# Altium PCB Board.PcbDoc
Units mil, origin at the board's own origin, x right, y up, seen from the top; angles counter-clockwise.
Board outline 2952.76 x 2952.76 mil, 2 copper layers (Top Layer, Bottom Layer); 48 components, 40 nets, 200 pads, 24 vias.
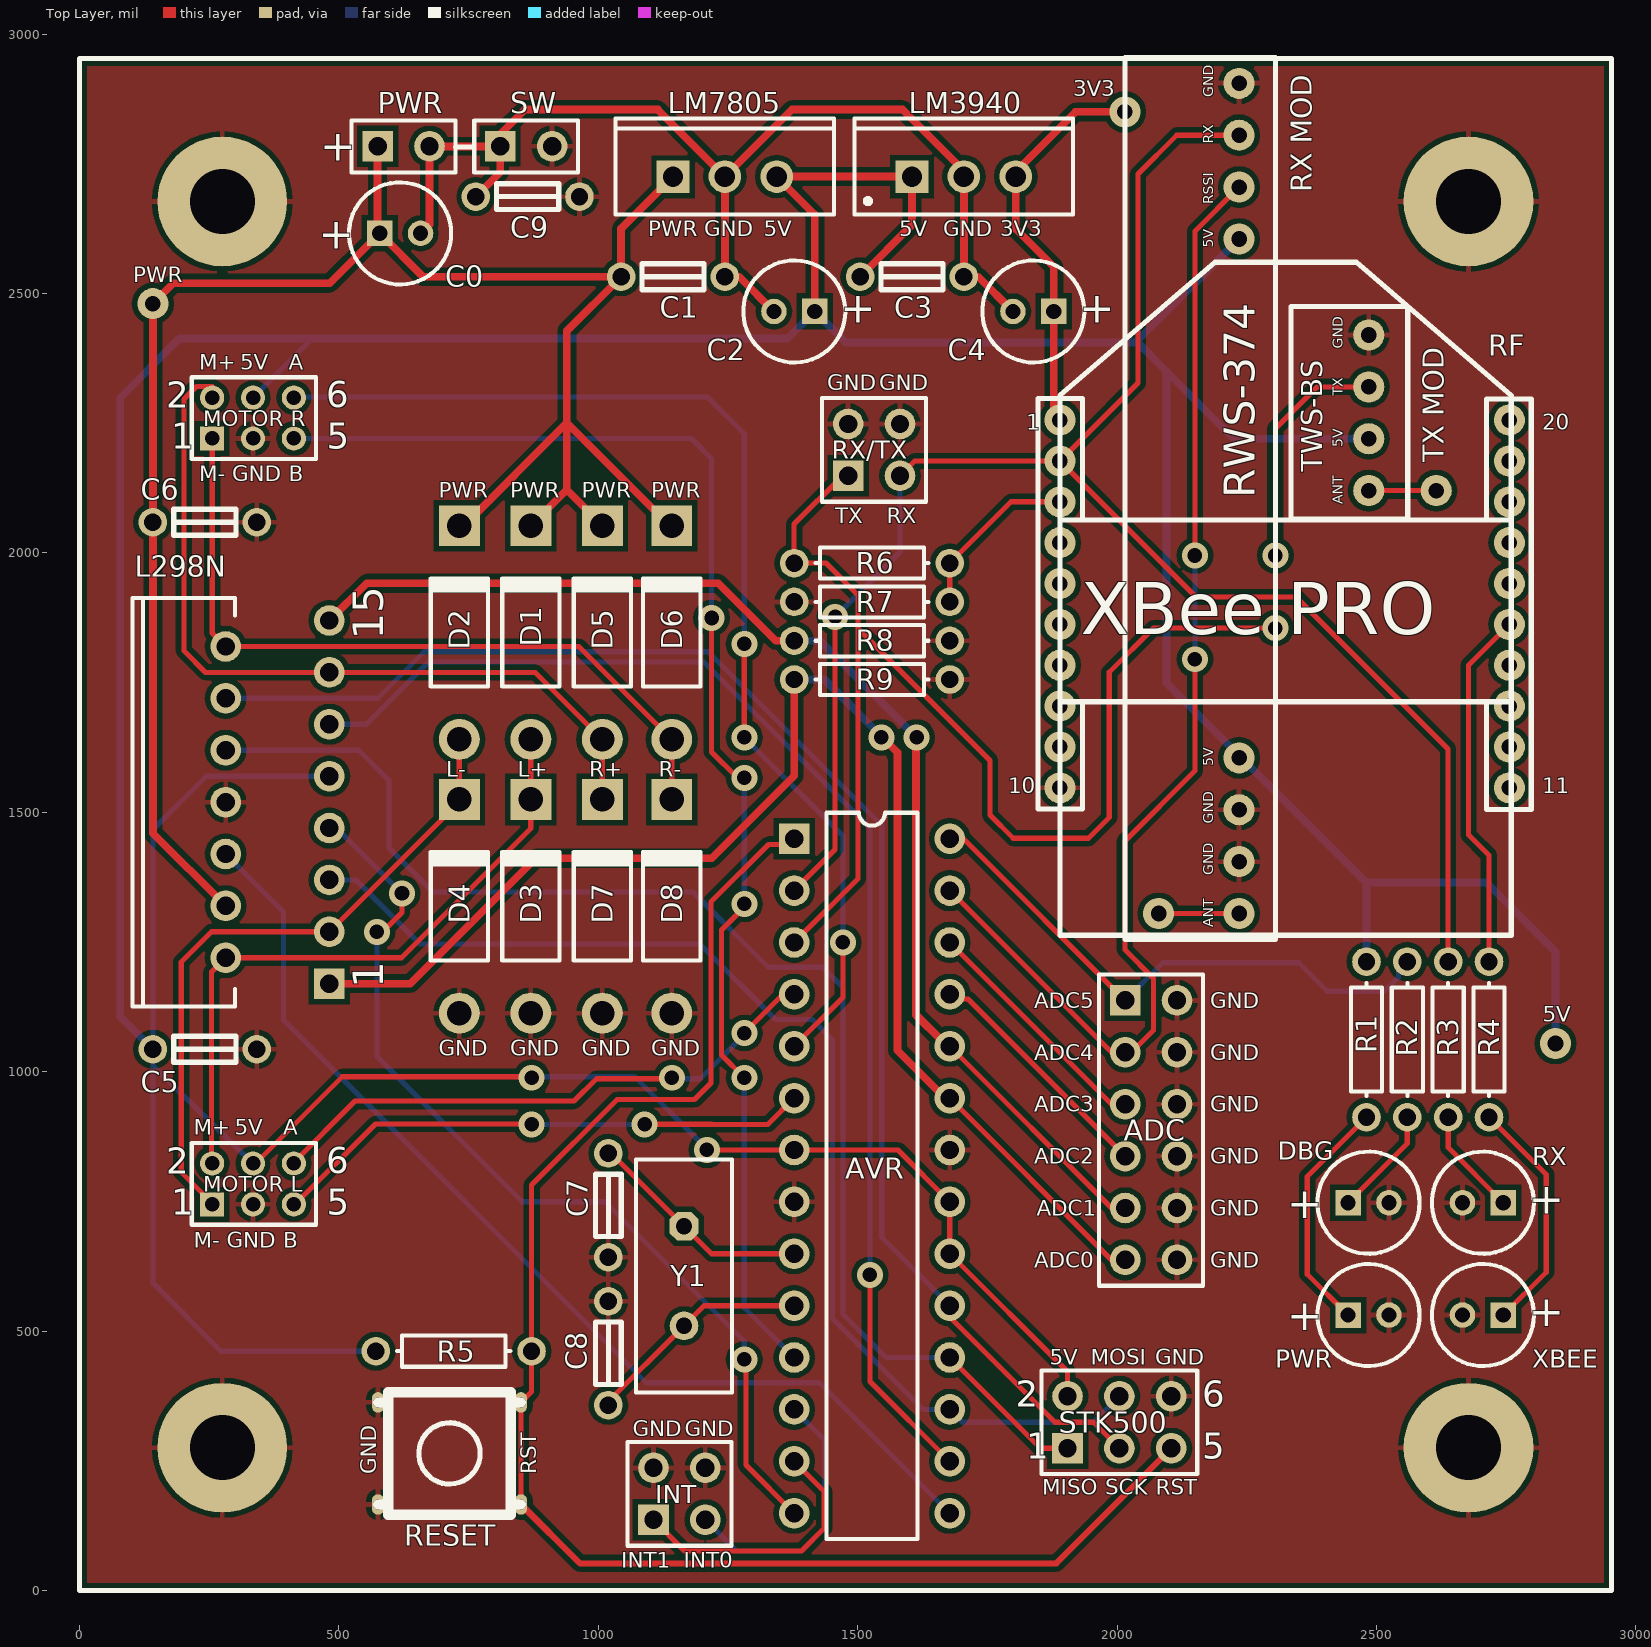
[diagram p0: Top Layer view]
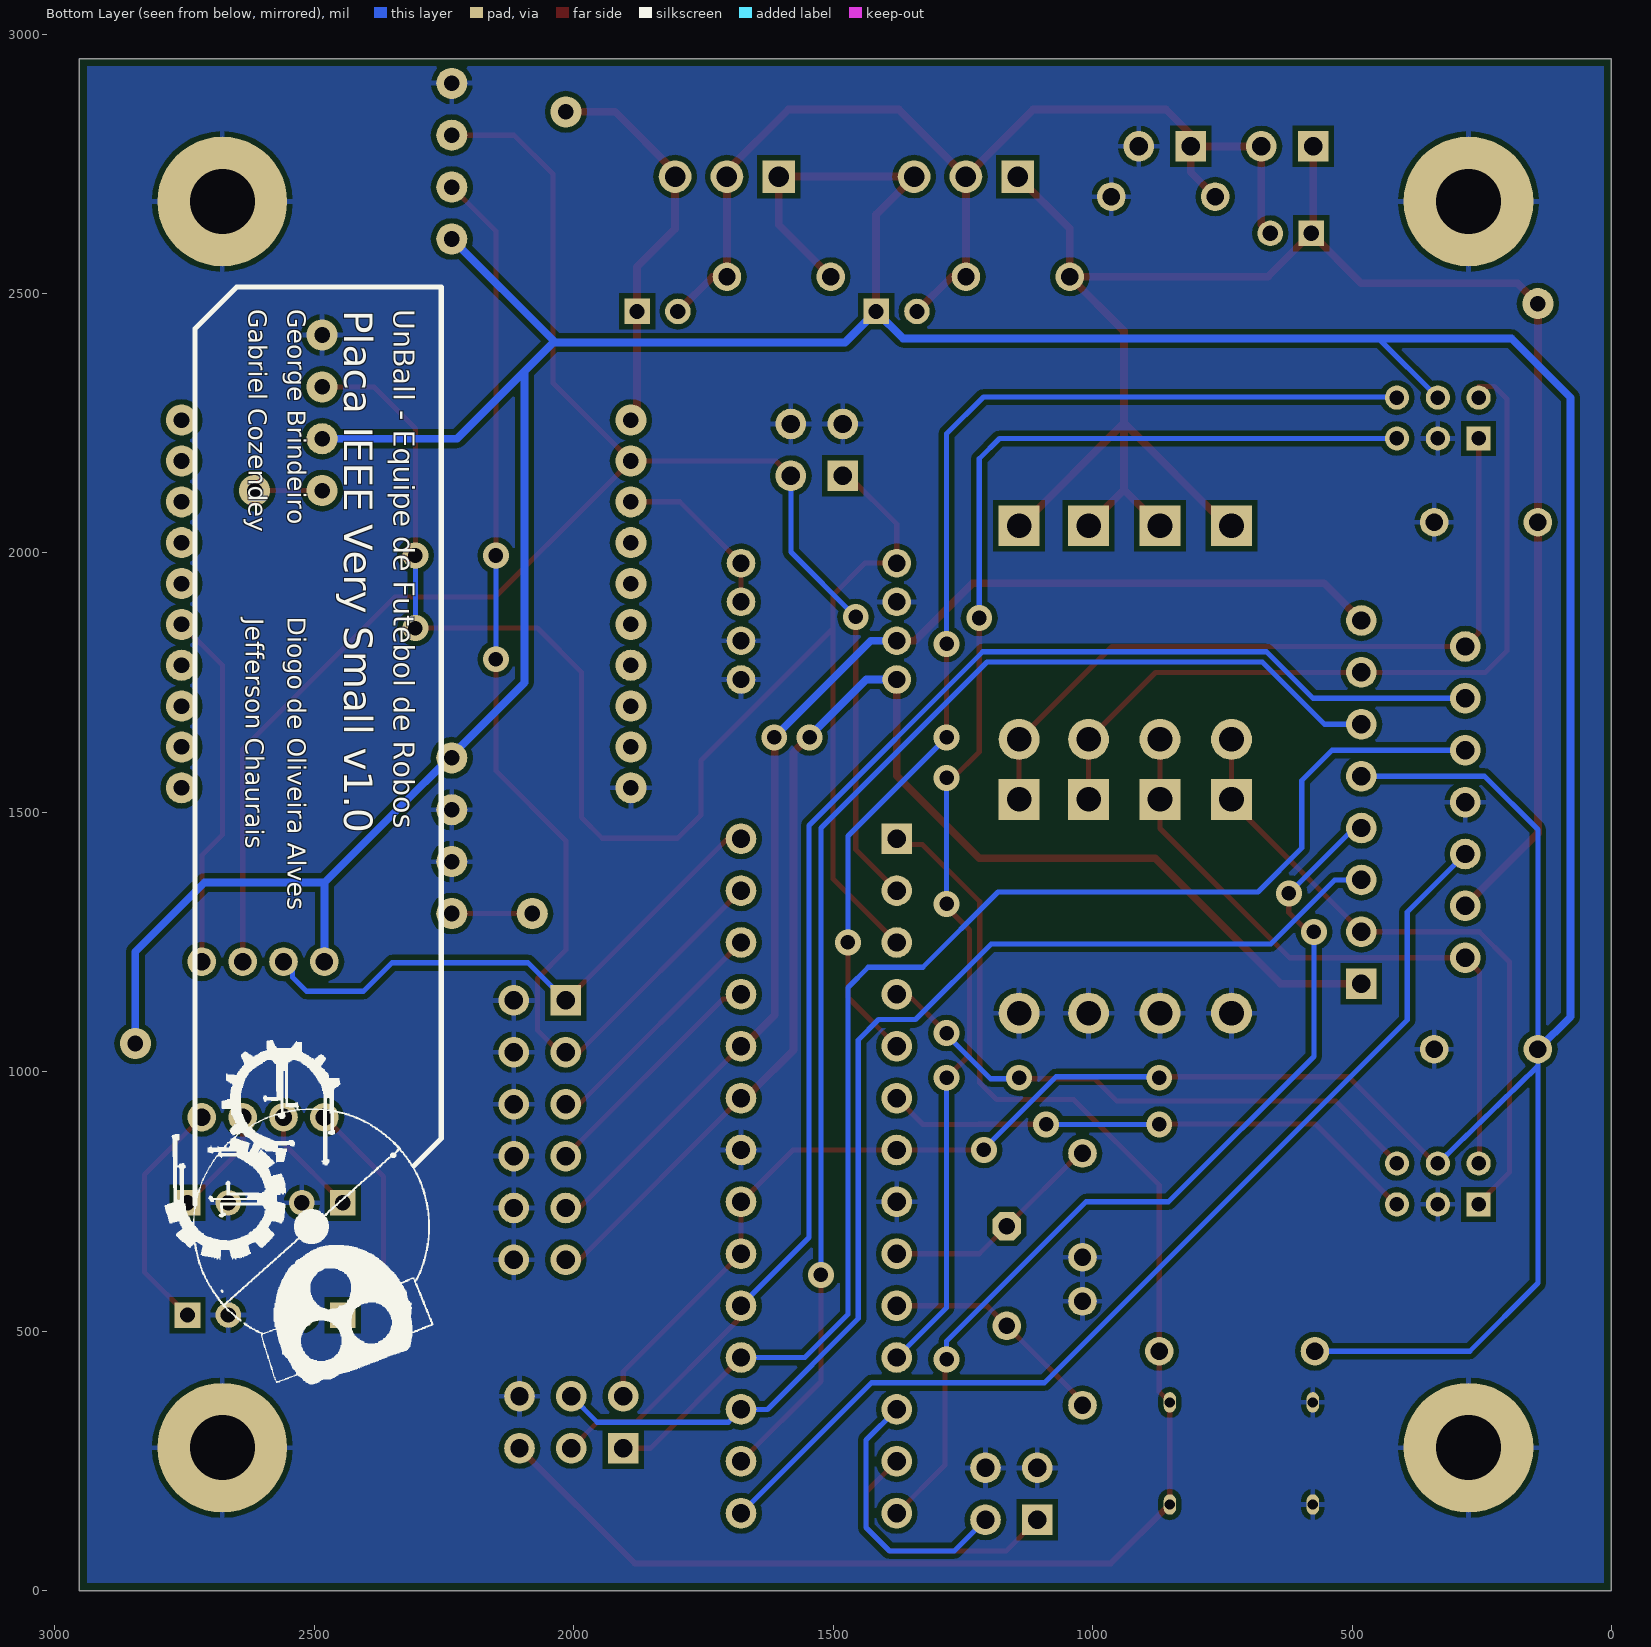
[diagram p1: Bottom Layer view, seen from below]

## Layer stack, top to bottom
Top Layer: signal copper 1.4
Dielectric: dielectric 12.6, FR-4, Dk 4.8
Bottom Layer: signal copper 1.4

## Board outline
0,0 0,2952.76 2952.76,2952.76 2952.76,0

## Design rules (kind name [scope] priority, off if disabled: settings)
Clearance [All] p1: gap=10
HoleSize [All] p1: absolutevalues=TRUE maxlimit=250 minlimit=1 maxpercent=80.000 minpercent=20.000
PolygonConnect [All] p1: connectstyle=Relief reliefconductorwidth=10 reliefentries=4 polygonreliefangle="90 Angle"
RoomDefinition Schematic [InComponentClass('Schematic')] p1: confinementstyle=ConfineIn formatcopy=TRUE lockcomponents=FALSE outline 3100,-140 -115,-140 -115,3085 3100,3085
RoutingVias [All] p1: holewidth=28 width=50 viastyle="Through Hole" minholewidth=28 minwidth=50 maxholewidth=28 maxwidth=50
SilkToSilkClearance [All] p1 off: silktosilkclearance=10
SilkscreenOverComponentPads [All] p1 off: minsilkscreentomaskgap=10
SolderMaskExpansion [All] p1: expansion=4
Width [All] p1: maxlimit=15 minlimit=8 preferedwidth=10
25 further rules are at their usual default settings.

## Components (designator, comment, footprint, x,y, rotation, side; value= is the part's Value field where it differs from the comment)
ADC "Header 6X2" HDR2X6 2015.5,1137.5 r270 top
AVR "ATmega8-16PI" 28P3 1527.56,799.21 r270 top
C0 "Cap Pol1" B 618.11,2615.75 r0 top
C1 "Cap" C_NANO_HOLES 1044.09,2532.28 r0 top
C2 "Cap Pol1" B 1377.95,2465.35 r180 top
C3 "Cap" C_NANO_HOLES 1504.72,2532.28 r0 top
C4 "Cap Pol1" B 1838.58,2465.35 r180 top
C5 "Cap" C_NANO_HOLES 141.73,1043.31 r0 top
C6 "Cap" C_NANO_HOLES 141.73,2059.06 r0 top
C7 "Cap" C_NANO_HOLES 1019.49,842.6 r270 top
C8 "Cap" C_NANO_HOLES 1019.5,357.5 r90 top
C9 "Cap" C_NANO_HOLES 763.78,2686.61 r0 top
D1 "Diode 1N4007" DO-41 870.08,1846.46 r90 top
D2 "Diode 1N4007" DO-41 732.28,1846.46 r90 top
D3 "Diode 1N4007" DO-41 870.08,1318.9 r90 top
D4 "Diode 1N4007" DO-41 732.28,1318.9 r90 top
D5 "Diode 1N4007" DO-41 1007.88,1846.46 r90 top
D6 "Diode 1N4007" DO-41 1141.73,1846.46 r90 top
D7 "Diode 1N4007" DO-41 1007.88,1318.9 r90 top
D8 "Diode 1N4007" DO-41 1141.73,1318.9 r90 top
DBG "LED0" B 2484.51,747.6 r0 top (schematic designator DBG_LED)
INT "Header 2X2" HDR2X2 1106.5,136.5 r0 top
L298N "L298N" Multiwatt15V 381.89,1519.68 r90 top
LM3940 "LM3940IT-3.3" T03B 1704.72,2725.2 r0 top
LM7805 "µA7805CKC" KC03 1244.09,2725.2 r0 top
"MOTOR L" "Header 3X2 (2mm)" HDR2x3_2MM 255.91,744.5 r0 top
"MOTOR R" "Header 3X2 (2mm)" HDR2x3_2MM 255.91,2220.47 r0 top
PWR "LED0" B 2484.51,531.06 r0 top (schematic designator PWR_LED)
PWR "Header 2" HDR1X2 574.8,2783.46 r0 top
R1 "" AXIAL-0.3 2480.57,1062.24 r270 top
R2 "" AXIAL-0.3 2559.32,1062.24 r270 top
R3 "" AXIAL-0.3 2638.06,1062.24 r270 top
R4 "" AXIAL-0.3 2716.8,1062.24 r270 top
R5 "" AXIAL-0.3 721.5,461.5 r180 top
R6 "" AXIAL-0.3 1527.56,1980.31 r180 top
R7 "" AXIAL-0.3 1527.56,1905.51 r180 top
R8 "" AXIAL-0.3 1527.56,1830.71 r180 top
R9 "" AXIAL-0.3 1527.56,1755.91 r180 top
RESET "SW-PB" PUSHBUTTON 831.46,382.52 r180 top
RF "XBee Pro 60mW" XBEE_PRO 1889.76,1547.24 r0 top
RX "LED0" B 2704.98,747.6 r180 top (schematic designator RX_LED)
"RX MOD" "RWS-374" RWS-374 2235,2905 r0 top (schematic designator RX)
RX/TX "Header 2X2" HDR2X2 1481.5,2148.5 r0 top
STK500 "Header 3X2" HDR2X3 1904.5,274.5 r0 top
SW "Header 2" HDR1X2 811.02,2783.46 r0 top (schematic designator PWR_SW)
"TX MOD" "TWS-BS" TWS-BS 2485,2420 r0 top
XBEE "LED0" B 2704.98,531.06 r180 top (schematic designator XBEE_LED)
Y1 "16MHZ" BCY-W2/E4.7 1165.35,606.3 r270 top

## Footprints (in the part's own frame and the unit in brackets; to place one, negate y for a bottom-side part, rotate by r counter-clockwise, add the part's x,y. Pads: shape width x height; smd on the part's side, far side on the other; paste and mask are expansions set on the pad)
28P3 [mm] "DIP; 28 Leads; Row Spacing 7.62 mm; Pitch 2.54 mm"
  rect 1.5x1.5 hole 0.9: 1(-16.51,-3.81)
  round 1.5 hole 0.9: 2(-13.97,-3.81) 3(-11.43,-3.81) 4(-8.89,-3.81) 5(-6.35,-3.81) 6(-3.81,-3.81) 7(-1.27,-3.81) 8(1.27,-3.81) 9(3.81,-3.81) 10(6.35,-3.81) 11(8.89,-3.81) 12(11.43,-3.81) 13(13.97,-3.81) 14(16.51,-3.81) 15(16.51,3.81) 16(13.97,3.81) 17(11.43,3.81) 18(8.89,3.81) 19(6.35,3.81) 20(3.81,3.81) 21(1.27,3.81) 22(-1.27,3.81) 23(-3.81,3.81) 24(-6.35,3.81) 25(-8.89,3.81) 26(-11.43,3.81) 27(-13.97,3.81) 28(-16.51,3.81)
  silkscreen extent -17.78,-2.23 17.78,2.22
AXIAL-0.3 [mm] "Axial Device, Thru-Hole; 2 Leads; 0.3 in Pin Spacing"
  round 1.4 hole 0.85: 1(-3.81,0) 2(3.81,0)
  silkscreen extent -2.77,-0.76 2.77,0.76
B [mm] "Capacitor, Electrolytic, Radial; Body 5 x 6.8 mm (Dia.xH typ); Pin Spacing 2 mm (typ)"
  rect 1.25x1.25 hole 0.75: 1(-1,0)
  round 1.25 hole 0.75: 2(1,0)
  silkscreen extent -2.5,-2.5 2.5,2.5
BCY-W2/E4.7 [mm] "Quartz Crystal, Thru-Hole; 2 Leads; Body 11.35 x 4.65 x 13.46 mm (LxWxH max)"
  oct 1.4x1.4 hole 0.8: 1(-2.44,0)
  round 1.4 hole 0.8: 2(2.44,0)
  silkscreen extent -5.7,-2.35 5.7,2.35
C_NANO_HOLES [mm] "C_NANO com furos maiores"
  round 1.4 hole 0.85: 1(0,0) 2(5.08,0)
  silkscreen extent 1.02,-0.64 4.06,0.63
DO-41 [mm] "Diode, Axial; Body 5.2 x 2.7 mm (LxDia. max), Lead Dia. 0.86 mm (max)"
  round 2 hole 1.2: 1(-5.23,0)
  rect 2x2 hole 1.2: 2(5.23,0)
  silkscreen extent -2.65,-1.4 2.75,1.4
HDR1X2 [mm] "Connector; Header; 2 Position"
  rect 1.5x1.5 hole 0.9: 1(0,0)
  round 1.5 hole 0.9: 2(2.54,0)
  silkscreen extent -1.27,-1.27 3.81,1.27
HDR2X2 [mm] "Connector; Header; 2x2 Position"
  rect 1.5x1.5 hole 0.9: 1(0,0)
  round 1.5 hole 0.9: 2(0,2.54) 3(2.54,0) 4(2.54,2.54)
  silkscreen extent -1.27,-1.27 3.81,3.81
HDR2X3 [mm] "Connector; Header; 3x2 Position"
  rect 1.5x1.5 hole 0.9: 1(0,0)
  round 1.5 hole 0.9: 2(0,2.54) 3(2.54,0) 4(2.54,2.54) 5(5.08,0) 6(5.08,2.54)
  silkscreen extent -1.27,-1.27 6.35,3.81
HDR2x3_2MM [mm] "Header 2x3 (2mm pitch)"
  rect 1.18x1.18 hole 0.71: 1(0,0)
  round 1.18 hole 0.71: 2(0,2) 3(2,0) 4(2,2) 5(4,0) 6(4,2)
  silkscreen extent -1,-1 5.08,3
HDR2X6 [mm] "Connector; Header; 6x2 Position"
  rect 1.5x1.5 hole 0.9: 1(0,0)
  round 1.5 hole 0.9: 2(0,2.54) 3(2.54,0) 4(2.54,2.54) 5(5.08,0) 6(5.08,2.54) 7(7.62,0) 8(7.62,2.54) 9(10.16,0) 10(10.16,2.54) 11(12.7,0) 12(12.7,2.54)
  silkscreen extent -1.27,-1.27 13.97,3.81
KC03 [mm] "TO, Thru-Hole, Vertical, Heatsink Mounted; 3 In-Line Leads; Pitch 2.54 mm"
  rect 1.6x1.6 hole 1: 1(-2.54,0)
  round 1.6 hole 1: 2(0,0) 3(2.54,0)
  silkscreen extent -5.35,-1.85 5.35,2.85
Multiwatt15V [mm] "TO, Thru-Hole, Vertical, Heatsink Mounted; 15 Bent Staggered Leads; Pitch 1.27 mm"
  rect 1.5x1.5 hole 0.9: 1(-8.89,-2.54)
  round 1.5 hole 0.9: 2(-7.62,2.54) 3(-6.35,-2.54) 4(-5.08,2.54) 5(-3.81,-2.54) 6(-2.54,2.54) 7(-1.27,-2.54) 8(0,2.54) 9(1.27,-2.54) 10(2.54,2.54) 11(3.81,-2.54) 12(5.08,2.54) 13(6.35,-2.54) 14(7.62,2.54) 15(8.89,-2.54)
  silkscreen extent -10,2.09 10,7.09
PUSHBUTTON [mm]
  oval 0.6x1 hole 0.5: 1(-0.5,5.5) 1(-0.5,0.5) 2(6.5,5.5) 2(6.5,0.5)
  silkscreen extent -0.5,0 6.5,6
RWS-374 [mil] "Receptor RF (RX)"
  round 60 hole 30: 1(0,0) 2(0,-100) 3(0,-200) 4(0,-300) 5(0,-1300) 6(0,-1400) 7(0,-1500) 8(0,-1600)
  silkscreen extent -220,-1650 70,50
T03B [mm] "TO, Thru-Hole, Vertical, Heatsink Mounted; 3 In-Line Leads; Pitch 2.54 mm"
  rect 1.6x1.6 hole 1: 1(-2.54,0)
  round 1.6 hole 1: 2(0,0) 3(2.54,0)
  silkscreen extent -5.35,-1.85 5.35,2.85, body extent -5.4,-1.9 5.4,2.9, height 19.4
TWS-BS [mil] "Receptor RF (TX)"
  round 60 hole 30: 1(0,0) 2(0,-100) 3(0,-200) 4(0,-300)
  silkscreen extent -150,-355 75,55
XBEE_PRO [mil]
  round 60 hole 30: 1(0,708.66) 2(0,629.92) 3(0,551.18) 4(0,472.44) 5(0,393.7) 6(0,314.96) 7(0,236.22) 8(0,157.48) 9(0,78.74) 10(0,0) 11(866.14,0) 12(866.14,78.74) 13(866.14,157.48) 14(866.14,236.22) 15(866.14,314.96) 16(866.14,393.7) 17(866.14,472.44) 18(866.14,551.18) 19(866.14,629.92) 20(866.14,708.66)
  silkscreen extent 0,-284 870,1013

## Part data
ADC: "Header, 6-Pin, Dual row"
AVR: "8-Bit AVR Microcontroller with 8K Bytes of In-System Programmable Flash Memory"
C0 C2 C4: "Polarized Capacitor (Radial)"
C1 C3 C5 C6 C7 C8 C9: "Capacitor"
D1 D2 D3 D4 D5 D6 D7 D8: "1 Amp General Purpose Rectifier"
DBG PWR RX XBEE: "Typical INFRARED GaAs LED"
INT RX/TX: "Header, 2-Pin, Dual row"
L298N: "Dual Full Bridge Driver"
LM3940: "1A Low Dropout Regulator for 5V to 3.3V Conversion"
LM7805: "Positive-Voltage Regulator"
"MOTOR L" "MOTOR R": library part "Header 3X2", "Header, 3-Pin, Dual row"
PWR SW: "Header, 2-Pin"
R1 R2 R3 R4 R5 R6 R7 R8 R9: library part Res1, "Resistor"
RESET: "Switch"
RF: library part XBee
"RX MOD": "Receptor RF Soldafria"
STK500: "Header, 3-Pin, Dual row"
"TX MOD": "Transmissor RF Soldafria"
Y1: library part ECS-120-32-1, "Crystal Oscillator"

## Free pads (board coordinates)
  round 60 hole 30: 0(141.73,2480.31) 1(2844.87,1054.5) 2(2015,2850) ANT(2080,1305) ANT(2615,2120)
  round 250 hole 125: 0(275.59,2677.17) 1(2677.17,2677.17) 2(275.59,275.59) 3(2677.17,275.59)

## Via types
v1: diameter 50, hole 28, Top Layer to Bottom Layer, 24 vias

## Nets (pads, with @x,y where several pads share a name; then routed paths per layer and width w, separated by ;. In a path a pad name is that pad's centre, name@x,y a point inside that pad or via, vN(x,y) a via of type N, cw(c..) or ccw(c..) an arc to the next point about the centre after c; other vN are vias at no path point)
3V3: C4.1 LM3940.3 pad.2@2015,2850 RF.1 | length 772.1
  Top Layer w15: RF.1 1877.95,2267.72 C4.1 1877.95,2551.18 1804.72,2624.41 LM3940.3 1804.72,2734.72 1920,2850 pad.2@2015,2850
5V: "MOTOR L.4" "MOTOR R.4" "RX MOD.4" "RX MOD.5" "TX MOD.3" AVR.7 AVR.20 AVR.21 C2.1 C3.1 C5.1 L298N.9 LM3940.1 LM7805.3 pad.1@2844.87,1054.5 R1.1 R5.2 STK500.2 | length 10974.6
  Top Layer w10: 336.94,820.94 506.5,990.5 865.5,990.5 v1@871.5,996.5 ; v1(1209.5,849.5) AVR.7@1377.27,849.5 ; AVR.7@1367.77,859 AVR.7@1377.27,849.5 ; AVR.20@1677.5,649.27 AVR.20 ; AVR.21@1677.5,749.15 AVR.21 ; AVR.20@1678.5,650.15 AVR.20 ; AVR.21@1678.5,748.27 AVR.21 ; STK500.2 1904.49,422.28 AVR.20 ; AVR.7@1377.27,849.5 AVR.7 1577.56,849.21 AVR.21 ; AVR.20 AVR.21
  Top Layer w15: C2.1 1417.32,2651.97 LM7805.3 LM3940.1 1604.72,2632.28 C3.1
  Bottom Layer w10: 142.73,1010.26 334.65,823.24 ; 334.64,2299.21 448.82,2413.39 ; L298N.9 244.68,1569.68 141.73,1466.73 C5.1 141.73,592.73 272.97,461.49 R5.2 ; v1@871.5,996.5 877.5,990.5 1070.5,990.5 v1@1202,859
  Bottom Layer w15: C5.1 78.74,1106.3 78.74,2299.21 192.91,2413.39 448.82,2413.39 1365.35,2413.39 C2.1 1477.18,2405.5 2039.5,2405.5 2095,2350 ; 2039.5,2409.5 2235,2605 ; R1.1 2480.58,1364.42 ; 2485,2220 2225,2220 2095,2350 ; pad.1@2844.87,1054.5 2844.87,1231.5 2711.36,1365 2480.58,1365 2480.58,1364.42 ; 2095,2350 2095,1750 2480.58,1364.42
  other v1: 871.5,988.5
A_RX: "RX MOD.8" pad.ANT@2080,1305 | length 155
  Top Layer w10: pad.ANT@2080,1305 2235,1305
A_TX: "TX MOD.4" pad.ANT@2615,2120 | length 130
  Top Layer w10: 2485,2120 pad.ANT@2615,2120
ADC0: ADC.11 AVR.23 L298N.1 R9.2 | length 2664.6
  Top Layer w10: AVR.23@1677.56,940.44 AVR.23 1989.27,637.5 ADC.11
  Top Layer w15: L298N.1 637.68,1169.68 879.5,1411.5 1218.58,1411.5 1377.56,1570.47 R9.2 ; v1@1545.5,1646.5 1576.5,1615.5 1576.5,1041.5 AVR.23@1654.65,963.34
  Bottom Layer w15: R9.2 1436.08,1755.91 v1@1545.5,1646.5
  other v1: 1545.5,1644.5
ADC1: ADC.9 AVR.24 L298N.15 R8.2 | length 2379.7
  Top Layer w10: AVR.24@1677.56,1040.44 AVR.24 1989.27,737.5 ADC.9
  Top Layer w15: L298N.15 553.7,1941.5 1231.5,1941.5 1342.28,1830.71 R8.2 ; v1@1612.5,1643.5 1612.5,1109.5 1661.84,1060.16 AVR.24@1677.56,1060.16
  Bottom Layer w15: R8.2 1413.5,1830.71 1427.28,1830.71 v1(1613.5,1644.5)
ADC2: ADC.7 AVR.25 | length 475.8
  Top Layer w10: AVR.25@1677.56,1140.44 AVR.25 1686.33,1140.44 1712.56,1140.44 ADC.7
ADC3: ADC.5 AVR.26 | length 475.8
  Top Layer w10: AVR.26@1677.56,1240.44 AVR.26 1989.27,937.5 ADC.5
ADC4: "RX MOD.3" ADC.3 AVR.27 | length 2286.7
  Top Layer w10: AVR.27@1686.22,1349.21 AVR.27 1989.27,1037.5 ADC.3 2027.5,1037.5 2070,1080 2070,1180 2015,1235 2015,1445 2150,1580 v1(2150,1795) ; v1(2150,1995) 2150,2620 2235,2705
  Bottom Layer w10: v1(2150,1795) v1(2150,1995)
ADC5: ADC.1 AVR.28 R2.1 | length 1124.4
  Top Layer w10: AVR.28@1677.56,1440.44 AVR.28 1703.78,1449.21 ADC.1 ; R2.1@2540.77,1212.24 R2.1@2555.38,1226.85
  Bottom Layer w10: ADC.1 2088,1210 2350,1210 2405,1155 2515,1155 2542.07,1182.07 2542.07,1195 R2.1
AL: "MOTOR L.6" AVR.4 | length 1099.6
  Top Layer w10: 413.11,825.11 531.5,943.5 953.5,943.5 996.5,986.5 v1@1141.73,986.5 ; v1(1281.5,1074.5) 1356.21,1149.21 AVR.4
  Bottom Layer w10: v1@1141.73,986.5 1196.5,986.5 v1@1283,1073
  other v1: 1141.73,988.5
AR: "MOTOR R.6" AVR.5 | length 2185.3
  Top Layer w10: v1(1281.5,1644.5) v1(1281.5,1824.5) ; AVR.5 1471.5,1143.15 v1@1471.5,1257.5
  Bottom Layer w10: 414.5,2300.5 1210.5,2300.5 1281.5,2229.5 v1@1281.5,1833.5 ; v1(1281.5,1644.5) 1471.5,1454.5 v1@1471.5,1257.5
  other v1: 1471.5,1249.21
BL: "MOTOR L.5" AVR.6 | length 1062.1
  Top Layer w10: 415.24,744.24 570.5,899.5 863.5,899.5 v1@871.5,907.5 ; v1@1085.5,888.5 v1(1089.5,898.5) 1090,899 1218.56,899 1219.06,898.5 1326.84,898.5 AVR.6
  Bottom Layer w10: v1(871.5,898.5) v1(1089.5,898.5)
BR: "MOTOR R.5" AVR.11 | length 2674.1
  Top Layer w10: v1(1218.5,1874.5) 1218.5,1616.5 1268.5,1566.5 v1(1281.5,1566.5) ; v1@1281.5,977.5 v1(1281.5,988.5) 1237.5,1032.5 1237.5,1273.5 v1@1284.5,1320.5
  Bottom Layer w10: 413.39,2220.47 1179.52,2220.47 1218.5,2181.5 v1(1218.5,1874.5) ; v1(1281.5,988.5) 1281.5,545.27 AVR.11 ; v1(1281.5,1323.5) v1(1281.5,1566.5) ; v1@1286.5,1324.5 v1@1287.5,1323.5
CL: AVR.17 L298N.5 STK500.4 | length 2291
  Bottom Layer w10: L298N.5 533.31,1369.68 656.5,1246.5 1195.5,1246.5 1341.5,1100.5 1412.5,1100.5 1451.5,1061.5 1451.5,524.21 1626.5,349.21 AVR.17 1702.27,324.5 1954.5,324.5 STK500.4
CR: AVR.18 L298N.10 STK500.1 | length 2625
  Top Layer w10: AVR.18 1852.28,274.49 STK500.1
  Bottom Layer w10: L298N.10 538.31,1619.68 596.79,1561.2 596.79,1431.2 681.5,1346.5 1182.5,1346.5 1327.5,1201.5 1432.5,1201.5 1471.5,1162.5 1471.5,532.5 1554.78,449.21 AVR.18
DL: AVR.14 L298N.7 | length 1818.7
  Top Layer w10: v1@573.5,1258.5 621.79,1306.79 v1(621.79,1343.79) ; v1@1278.5,438.5 1284.5,432.5 1284.5,242.27 AVR.14
  Bottom Layer w10: L298N.7@491.89,1473.68 v1(621.79,1343.79) ; v1@573.5,1258.5 573.5,1029.5 853.5,749.5 1012.5,749.5 1281.5,480.5 v1(1281.5,445.5)
  other v1: 573.5,1269.68
DR: AVR.19 L298N.12 STK500.3 | length 2873.8
  Top Layer w10: AVR.19 1677.56,527.43 1880.5,324.5 1954.49,324.5 STK500.3
  Bottom Layer w10: L298N.12 575.02,1719.68 664.84,1809.5 1211.78,1809.5 1546.5,1474.78 1546.5,680.27 AVR.19
ENL: AVR.15 L298N.6 | length 2044.1
  Bottom Layer w10: L298N.6 393.5,1308.08 393.5,1099.5 1092.5,400.5 1426.27,400.5 AVR.15
ENR: AVR.16 L298N.11 | length 2507.9
  Top Layer w10: v1(1523.5,608.5) 1523.5,403.27 AVR.16
  Bottom Layer w10: L298N.11 553.31,1669.68 673.12,1789.5 1203.5,1789.5 1523.5,1469.5 v1(1523.5,608.5)
GND: "MOTOR L.3" "MOTOR R.3" "RX MOD.1" "RX MOD.6" "RX MOD.7" "TX MOD.1" ADC.2 ADC.4 ADC.6 ADC.8 ADC.10 ADC.12 AVR.8 AVR.22 C5.2 C6.2 C7.2 C8.2 C9.2 D3.1 D4.1 D7.1 D8.1 DBG.2 INT.2 INT.4 L298N.8 pad.0@275.59,2677.17 pad.1@2677.17,2677.17 pad.2@275.59,275.59 pad.3 PWR.2@2523.88,531.06 R7.2 R8.1 R9.1 RESET.2 RF.10 RX.2 RX/TX.2 RX/TX.4 STK500.6 SW.2 XBEE.2
INT0: AVR.12 INT.3 | length 525.6
  Bottom Layer w10: INT.3 1266.49,76.5 1391.5,76.5 1436.5,121.5 1436.5,290.27 AVR.12
INT1: AVR.13 INT.1 | length 524.8
  Top Layer w10: INT.1 1166.49,76.5 1391.5,76.5 1435.5,120.5 1435.5,191.27 AVR.13
L+: "MOTOR L.2" D1.1 D3.2 L298N.2 | length 1270.8
  Top Layer w10: 254.5,823.24 254.5,1192.29 L298N.2 620.68,1219.68 870.08,1469.08 D3.2 D1.1
L-: "MOTOR L.1" D2.1 D4.2 L298N.3 | length 1274.9
  Top Layer w10: 257.2,745.79 196.5,806.5 196.5,1211.5 254.68,1269.68 L298N.3 732.29,1520.08 D4.2 D2.1
NetDBG_1: DBG.1 R2.2 | length 231.9
  Top Layer w10: DBG.1 2559.31,861.77 R2.2 R2.2@2559.31,932.24
NetPWR_1: PWR.1@2445.14,531.06 R1.2 | length 461.1
  Top Layer w10: PWR.1@2445.14,531.06 2366.4,609.8 2366.4,798.07 R1.2
NetR3_2: R3.2 RX.1 | length 208.7
  Top Layer w10: R3.2 2638.05,853.9 RX.1
NetR4_2: R4.2 XBEE.1 | length 461.1
  Top Layer w10: R4.2 2827.03,802 2827.03,613.74 XBEE.1
NetR6_1: R6.1 R7.1 RF.3 | length 335.9
  Top Layer w10: R7.1 R6.1 1795.67,2098.42 RF.3
PWR: C0.1 C1.1 C6.1 D1.2 D2.2 D5.2 D6.2 L298N.4 LM7805.1 pad.0@141.73,2480.31 PWR.1@574.8,2783.46 | length 3834.3
  Top Layer w10: D2.2 D2.2@741.36,2052.36
  Top Layer w15: L298N.4 141.73,1459.84 141.73,2480.31 181.1,2519.69 482.68,2519.69 C0.1 ; PWR.1@574.8,2783.46 574.8,2619.68 C0.1 ; D2.2@741.36,2052.36 939.5,2250.5 ; D1.2 939.5,2121.78 ; D5.2 939.5,2121.78 ; D6.2@1137.63,2052.36 939.5,2250.5 ; LM7805.1 1044.09,2625.2 C1.1 ; C0.1 662.2,2532.28 C1.1 ; 939.5,2121.78 939.5,2250.5 ; 939.5,2250.5 939.5,2427.68 C1.1
PWR_SW: C0.2 C1.2 C2.2 C3.2 C4.2 C9.1 LM3940.2 LM7805.2 PWR.2@674.8,2783.46 SW.1 | length 2161.6
  Top Layer w15: C0.2 674.8,2633.07 674.8,2783.46 SW.1 ; C9.1 811.02,2733.86 SW.1 ; C2.2 1271.65,2532.28 C1.2 LM7805.2 ; C4.2 1732.28,2532.28 C3.2 LM3940.2 1704.72,2736.22 1586.61,2854.33 1373.23,2854.33 LM7805.2 ; SW.1 811.02,2807.09 858.27,2854.33 1114.96,2854.33 LM7805.2
R+: "MOTOR R.2" D5.1 D7.2 L298N.13 | length 1542.3
  Top Layer w10: 255.9,2320.47 225.47,2320.47 201.5,2296.5 201.5,1811.5 243.31,1769.68 L298N.13 878.74,1769.68 D5.1 D7.2
R-: "MOTOR R.1" D6.1 D8.2 L298N.14 | length 1461.3
  Top Layer w10: 255.9,2220.47 255.9,1845.67 L298N.14 962.6,1819.68 D6.1 D8.2
RST: AVR.1 R5.1 RESET.1 STK500.5 | length 2998.8
  Top Layer w10: RESET.1@851.14,165.98 851.14,362.83 871.5,383.19 R5.1 871.5,781.5 1036.5,946.5 1185.5,946.5 1217.5,978.5 1217.5,1327.5 1328.27,1438.27 AVR.1@1377.56,1438.27
  Top Layer w12: RESET.1@851.14,165.98 964.63,52.5 1882.5,52.5 STK500.5
RXD: "RX MOD.2" AVR.2 R3.1 RF.2 RX/TX.3 | length 3433
  Top Layer w10: AVR.2 1456.5,1428.15 v1(1456.5,1876.5) ; RX/TX.3 1610.16,2177.16 RF.2 ; 2235,2805 2115,2805 2040,2730 2040,2327.4 RF.2 ; R3.1@2637.8,1212.24 2637.8,1622.2 2345,1915 2151.93,1915 2051.93,2015 2051.72,2015 2040,2026.72 2040,2026.93 RF.2
  Bottom Layer w10: v1(1456.5,1876.5) 1581.49,2001.49 RX/TX.3
TXD: "TX MOD.2" AVR.3 R6.2 RX/TX.1 | length 3054.9
  Top Layer w10: AVR.3 1500.5,1372.15 1500.5,1854.5 ; RX/TX.1 1470.49,2148.49 1377.56,2055.56 R6.2 1438.68,1980.32 1500.5,1918.5 1500.5,1854.5 ; v1(2305,1855) 2070,1855 1985,1770 1985,1490 1945,1450 1800,1450 1755,1495 1755,1600 1500.5,1854.5 ; v1@2305,1990 v1(2305,1995) 2305,2240 2385,2320 2485,2320
  Bottom Layer w10: v1(2305,1855) v1(2305,1995)
XBEE: R4.1 RF.15 | length 698.9
  Top Layer w10: R4.1@2716.54,1212.24 2716.54,1417.32 2677.17,1456.69 2677.17,1783.46 RF.15
XTAL1: AVR.9 C7.1 Y1.1 | length 438
  Top Layer w10: C7.1@1019.69,842.6 1025.12,842.6 Y1.1 1218.51,649.21 AVR.9
XTAL2: AVR.10 C8.1 Y1.2 | length 441.6
  Top Layer w10: C8.1@1014.56,359.44 Y1.2 1204.33,549.21 AVR.10
pads on no net: RF.4 RF.5 RF.6 RF.7 RF.8 RF.9 RF.11 RF.12 RF.13 RF.14 RF.16 RF.17 RF.18 RF.19 RF.20

## Polygon pours and split planes (outlines as drawn)
GND on Bottom Layer "Bottom Layer GND" (solid, remove dead copper, pour order 6): 0,0 2952.76,0 2952.76,2952.76 0,2952.76 0,0
GND on Top Layer "Top Layer GND" (solid, remove dead copper, pour order 4): 0,0 2952.76,0 2952.76,2952.76 0,2952.76 0,0

## Silkscreen, mask and mechanical layers (free items; w line width, h text height)
Top Overlay:
  lines w10: 724.8,2782.5 760.02,2782.5 ; 1933.5,1712.5 1933.5,1506.5 1847.5,1506.5 1847.5,2297.5 1933.5,2297.5 1933.5,2295.5 1933.5,2064.5 ; 2712.17,1505.65 2798.17,1505.65 2798.17,2296.65 2712.17,2296.65 2712.17,2063.24 ; 2712.17,1507.65 2712.17,1713.24 ; 0,0 0,2952.76 2952.76,2952.76 2952.76,0 0,0
  text "3V3" at 1915,2880 h30
  text "+" at 464.5,2755.5 h60
  text "PWR" at 1096.5,2610.5 h30
  text "GND" at 1204.11,2610.5 h30
  text "5V" at 1319.1,2610.5 h30
  text "5V" at 1579.73,2610.5 h30
  text "GND" at 1664.74,2610.5 h30
  text "3V3" at 1774.5,2610.5 h30
  text "PWR" at 103.5,2521.5 h30
  text "M+" at 230.91,2352.5 h30
  text "5V" at 309.65,2352.5 h30
  text "A" at 403.39,2352.5 h30
  text "GND" at 1441.51,2313.5 h30
  text "GND" at 1541.51,2313.5 h30
  text "M-" at 230.91,2138.5 h30
  text "GND" at 294.66,2138.5 h30
  text "B" at 403.39,2138.5 h30
  text "PWR" at 692.3,2106.5 h30
  text "PWR" at 830.1,2106.5 h30
  text "PWR" at 967.89,2106.5 h30
  text "PWR" at 1101.75,2106.5 h30
  text "TX" at 1456.5,2057.5 h30
  text "RX" at 1556.5,2057.5 h30
  text "L-" at 707.29,1568.5 h30
  text "L+" at 845.09,1568.5 h30
  text "R+" at 982.88,1568.5 h30
  text "R-" at 1116.74,1568.5 h30
  text "ADC5" at 1840.5,1122.5 h30
  text "GND" at 2179.5,1122.5 h30
  text "5V" at 2819.87,1096.5 h30
  text "GND" at 692.3,1030.5 h30
  text "GND" at 830.1,1030.5 h30
  text "GND" at 967.89,1030.5 h30
  text "GND" at 1101.75,1030.5 h30
  text "ADC4" at 1840.5,1022.5 h30
  text "GND" at 2179.5,1022.5 h30
  text "ADC3" at 1840.5,922.5 h30
  text "GND" at 2179.5,922.5 h30
  text "M+" at 220.5,878.5 h30
  text "5V" at 299.24,878.5 h30
  text "A" at 392.98,878.5 h30
  text "ADC2" at 1840.5,822.5 h30
  text "GND" at 2179.5,822.5 h30
  text "ADC1" at 1845.49,722.5 h30
  text "GND" at 2179.5,722.5 h30
  text "M-" at 220.5,660.5 h30
  text "GND" at 284.25,660.5 h30
  text "B" at 392.98,660.5 h30
  text "ADC0" at 1840.5,622.5 h30
  text "GND" at 2179.5,622.5 h30
  text "5V" at 1870.5,435.5 h30
  text "MOSI" at 1949.5,435.5 h30
  text "GND" at 2073.5,435.5 h30
  text "GND" at 1066.51,297.5 h30
  text "GND" at 1166.51,297.5 h30
  text "GND" at 572.5,224.42 h30 r90
  text "RST" at 880.5,224.42 h30 r90
  text "MISO" at 1855.5,184.5 h30
  text "SCK" at 1977.5,184.5 h30
  text "RST" at 2074.5,184.5 h30
  text "INT1" at 1044.5,44.5 h30
  text "INT0" at 1164.5,44.5 h30
Bottom Overlay:
  drawing of 9 lines, arcs and shapes, not listed
  text "UnBall - Equipe de Futebol de Robos" at 2346.5,2469.5 h40 r90
  text "George Brindeiro" at 2551.5,2469.5 h35 r90
  text "Gabriel Cozendey" at 2626.5,2469.5 h35 r90
  text "Placa IEEE Very Small v1.0" at 2442.5,2467.5 h55 r90
  text "Diogo de Oliveira Alves" at 2551.5,1876.5 h35 r90
  text "Jefferson Chaurais" at 2632.33,1874.5 h35 r90

## Text inside footprints (layer, text, board x,y; h text height)
C0: Top Overlay "+" at 461.61,2586.22 h59.06
C2: Top Overlay "+" at 1534.45,2494.88 h59.06 r180
C4: Top Overlay "+" at 1995.08,2494.88 h59.06 r180
DBG: Top Overlay "+" at 2328.02,718.07 h59.06
L298N: Top Overlay "1" at 585.24,1160.63 h59.06 r90; Top Overlay "15" at 585.24,1832.28 h59.06 r90
"MOTOR L": Top Overlay "1" at 177.17,724.81 h50; Top Overlay "2" at 167.32,803.55 h50; Top Overlay "6" at 475.91,804.5 h50; Top Overlay "5" at 477.17,724.81 h50
"MOTOR R": Top Overlay "1" at 177.17,2200.79 h50; Top Overlay "2" at 167.32,2279.53 h50; Top Overlay "6" at 475.91,2280.47 h50; Top Overlay "5" at 477.17,2200.79 h50
PWR: Top Overlay "+" at 2328.02,501.54 h59.06
RF: Top Overlay "XBee PRO" at 1929.76,1843.24 h100; Top Overlay "1" at 1824.75,2237.24 h30; Top Overlay "10" at 1789.76,1537.24 h30; Top Overlay "20" at 2819.76,2237.24 h30; Top Overlay "11" at 2819.76,1537.24 h30
RX: Top Overlay "+" at 2861.48,777.13 h59.06 r180
"RX MOD": Top Overlay "5V" at 2185,1588.34 h20 r90; Top Overlay "ANT" at 2185,1278.34 h20 r90; Top Overlay "GND" at 2185,1378.34 h20 r90; Top Overlay "GND" at 2185,1478.34 h20 r90; Top Overlay "5V" at 2185,2588.34 h20 r90; Top Overlay "RSSI" at 2185,2671.68 h20 r90; Top Overlay "RX" at 2185,2788.34 h20 r90; Top Overlay "GND" at 2185,2878.34 h20 r90
STK500: Top Overlay "1" at 1824.5,254.5 h50; Top Overlay "2" at 1804.5,354.5 h50; Top Overlay "5" at 2164.5,254.5 h50; Top Overlay "6" at 2164.5,354.5 h50
"TX MOD": Top Overlay "GND" at 2435,2393.34 h20 r90; Top Overlay "5V" at 2435,2203.34 h20 r90; Top Overlay "TX" at 2435,2303.34 h20 r90; Top Overlay "ANT" at 2435,2093.34 h20 r90
XBEE: Top Overlay "+" at 2861.48,560.59 h59.06 r180